# Altium PCB card.PcbDoc
Units mil, origin at the board's own origin, x right, y up, seen from the top; angles counter-clockwise.
Board outline 5110 x 4320 mil, 2 copper layers (Top Layer, Bottom Layer); 35 components, 32 nets, 133 pads, 60 vias.
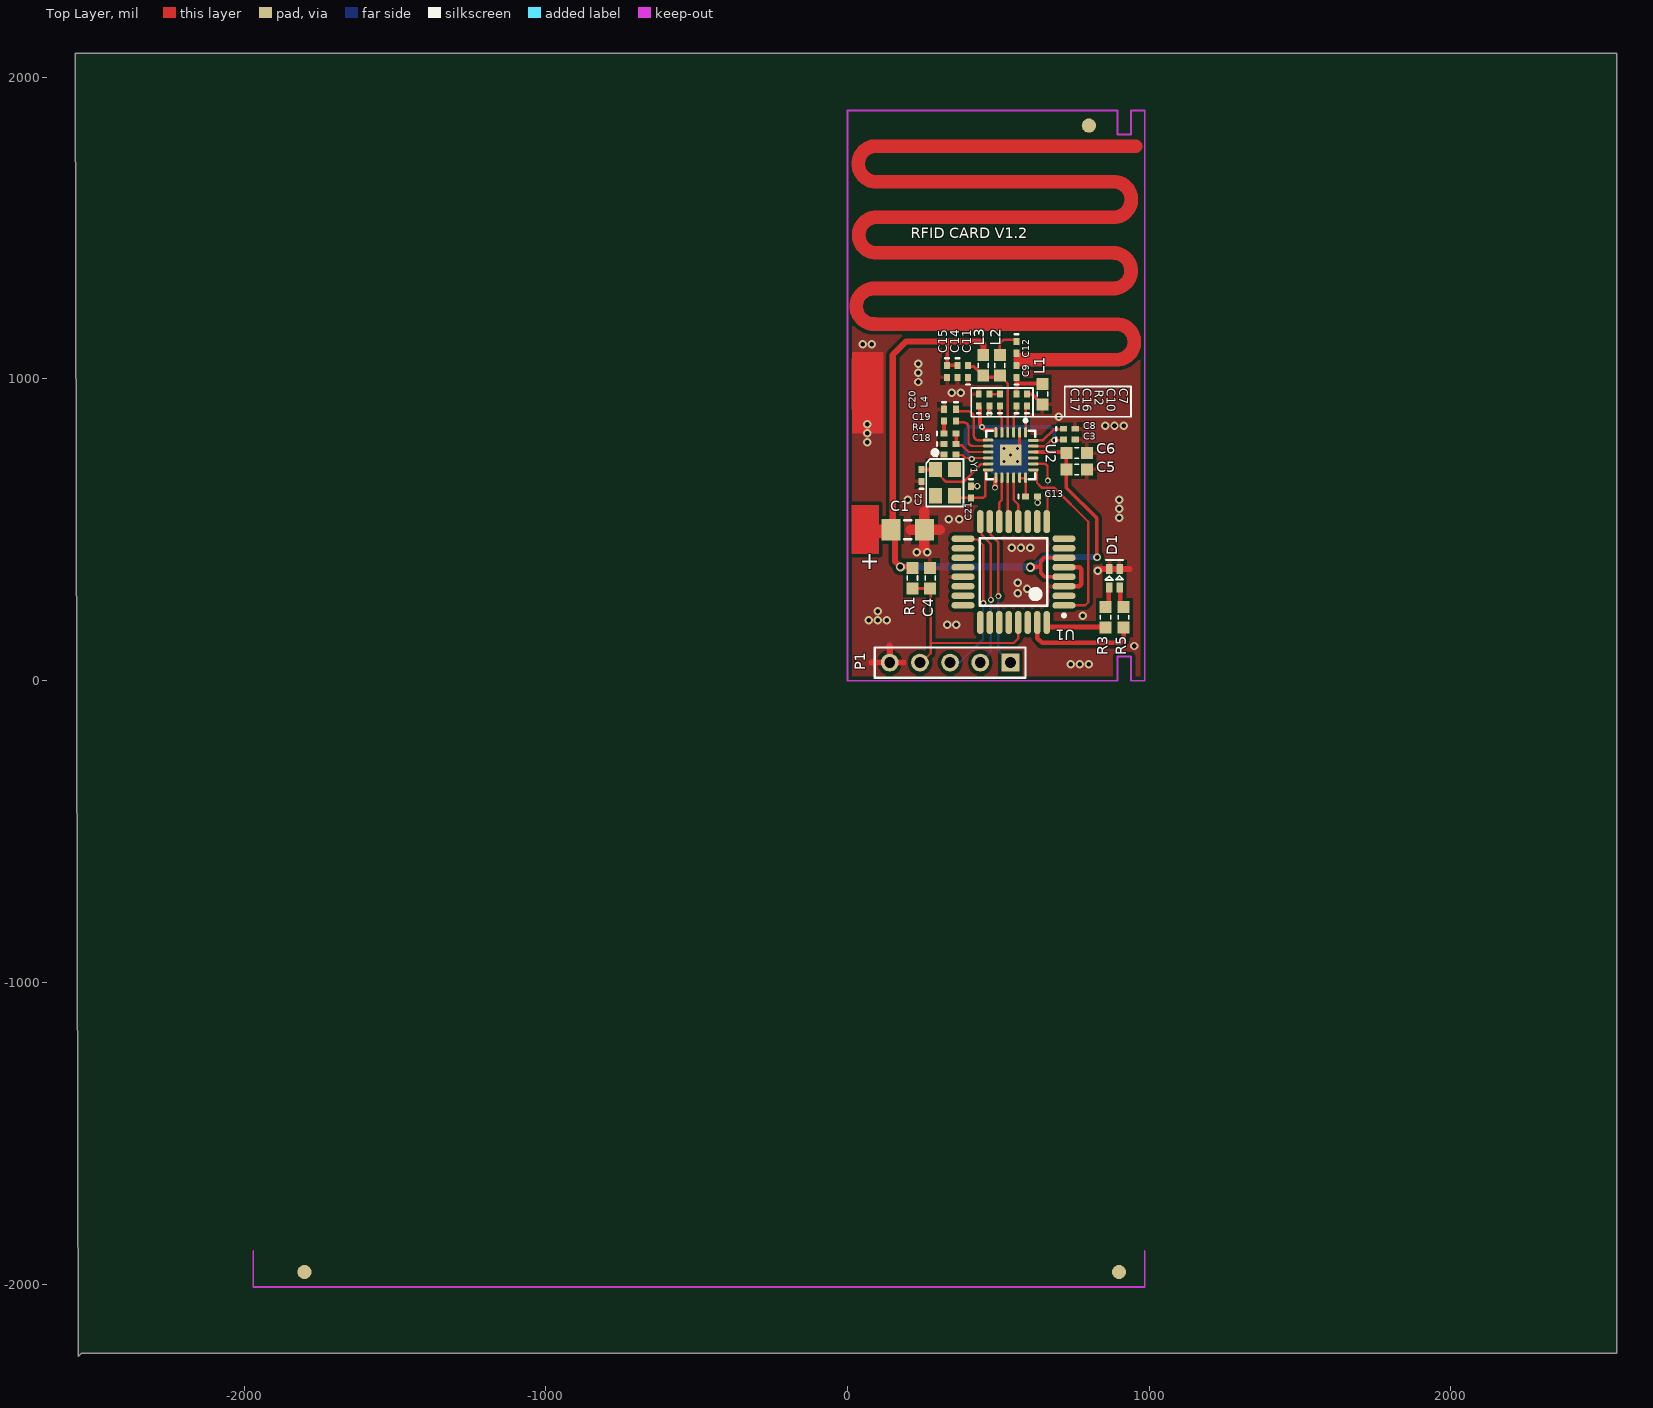
[diagram p0: Top Layer view]
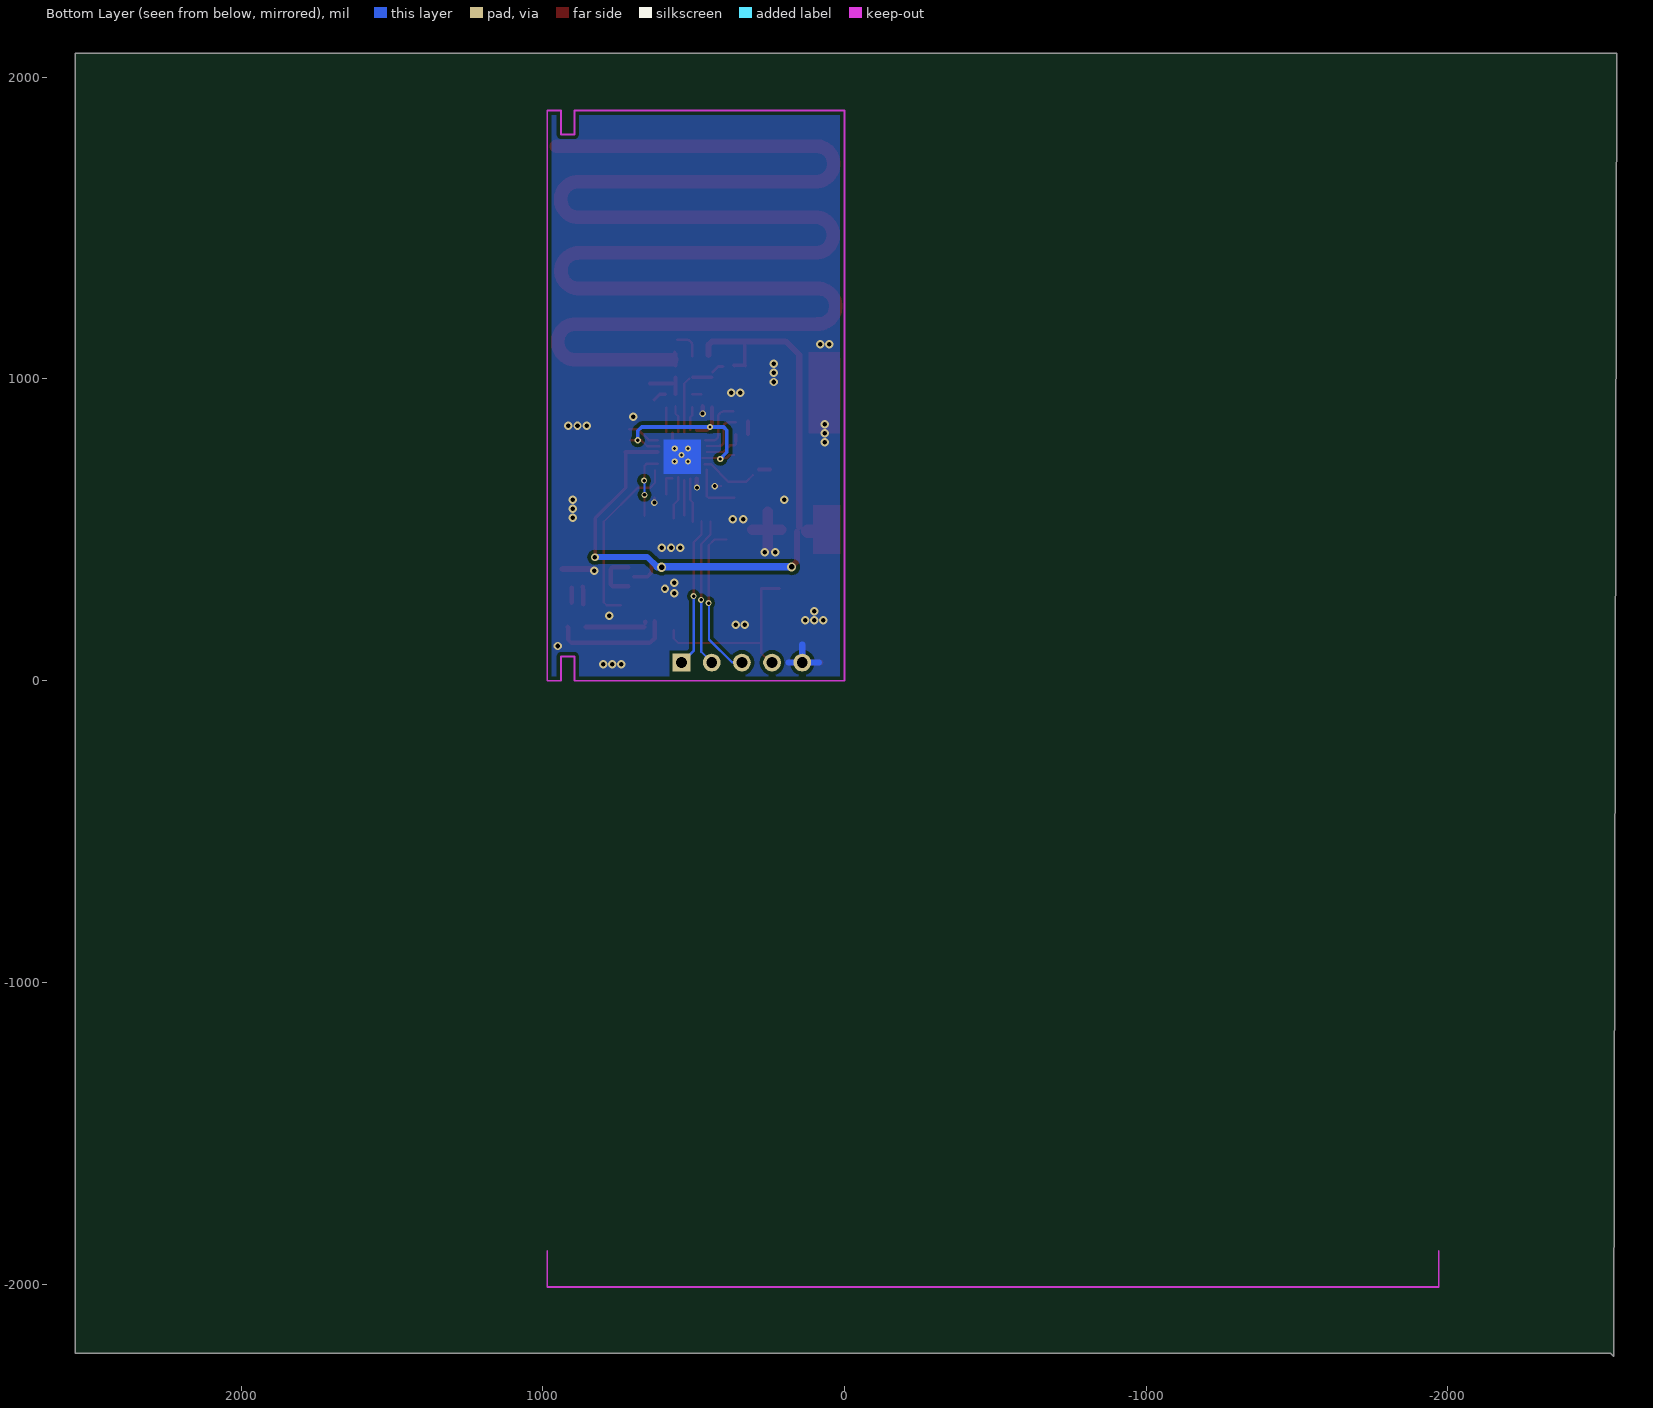
[diagram p1: Bottom Layer view, seen from below]

## Layer stack, top to bottom
Top Layer: signal copper 1.4
Dielectric: core 12.6, FR-4, Dk 4.8
Bottom Layer: signal copper 1.4

## Board outline
-2560,2080 2550,2080 2550,-2230 -2540,-2230 -2550,-2240

## Design rules (kind name [scope] priority, off if disabled: settings)
Clearance [All] p1 off: gap=8
ComponentClearance [All] p1 off: gap=10 collisioncheckmode=3 verticalgap=10
HoleSize [All] p1: absolutevalues=TRUE maxlimit=100 minlimit=0 maxpercent=80.000 minpercent=20.000
PolygonConnect [All] p1: connectstyle=Relief reliefconductorwidth=12 reliefentries=4 polygonreliefangle="90 Angle"
RoutingVias [All] p1: holewidth=15 width=25 viastyle="Through Hole" minholewidth=8 minwidth=15 maxholewidth=80 maxwidth=50
SolderMaskExpansion [All] p1: expansion=4
TestPointUsage [All] p1: valid=0 allowmultiple=FALSE
Testpoint [All] p1: side=15 testpointundercomponent=TRUE minsize=40 maxsize=100 preferedsize=60 minholesize=0 maxholesize=40 preferedholesize=32 testpointgrid=1 style=1023 order=0123456789
Width [All] p1: maxlimit=100 minlimit=8 preferedwidth=10 minimp=50.000000 maximp=50.000000 favimp=50.000000
17 further rules are at their usual default settings.

## Components (designator, comment, footprint, x,y, rotation, side; value= is the part's Value field where it differs from the comment)
C1 "Cap" 3216[1206] 200,500 r180 top
C2 "Cap" 0402-A 245,680 r90 top
C3 "Cap" 0402-A 735,800 r0 top
C4 "Cap" 0603 274,340 r90 top
C5 "Cap" 0603 760,700 r0 top
C6 "Cap" 0603 760,755 r0 top
C7 "Cap" 0402-A 595,930 r90 top
C8 "Cap" 0402-A 735,835 r0 top
C9 "Cap" 0402-A 560,1025 r90 top
C10 "Cap" 0402-A 560,930 r90 top
C11 "Cap" 0402-A 400,1025 r90 top
C12 "Cap" 0402-A 560,1105 r270 top
C13 "Cap" 0402-A 610,610 r0 top
C14 "Cap" 0402-A 365,1025 r270 top
C15 "Cap" 0402-A 330,1025 r270 top
C16 "Cap" 0402-A 470,930 r90 top
C17 "Cap" 0402-A 435,930 r90 top
C18 "Cap" 0402-A 340,750 r0 top
C19 "Cap" 0402-A 340,785 r0 top
C20 "Cap" 0402-A 320,880 r270 top
C21 "Cap" 0402-A 410,625 r270 top
D1 "LED" 0603-LED-DOUBLE 902,310 r90 top
L1 "Inductor" 0603 646,950 r270 top
L2 "Inductor" 0603 505,1045 r90 top
L3 "Inductor" 0603 450,1045 r90 top
L4 "Inductor" 0402-A 360,880 r270 top
P1 "ISP" HDR1X5 540,60 r180 top
R1 "Res1" 0603 215,340 r90 top
R2 "Res1" 0402-A 505,930 r90 top
R3 "Res1" 0603 855,210 r90 top
R4 "Res1" 0402-A 340,820 r0 top
R5 "Res1" 0603 915,210 r90 top
U1 "ATmega8-16AC" 32A_M 550,360 r180 top
U2 "A7139" QFN24N 541,748 r270 top
Y1 "12.8M CL=20pF" XT3225 355,700 r270 top

## Footprints (in the part's own frame and the unit in brackets; to place one, negate y for a bottom-side part, rotate by r counter-clockwise, add the part's x,y. Pads: shape width x height; smd on the part's side, far side on the other; paste and mask are expansions set on the pad)
32A_M [mm] "32-Pin Thin Quad Flat Pack 0.8 mm Pitch, IPC Low Density"
  oval 1.95x0.559 smd: 1(-4.25,2.8) 2(-4.25,2) 3(-4.25,1.2) 4(-4.25,0.4) 5(-4.25,-0.4) 6(-4.25,-1.2) 7(-4.25,-2) 8(-4.25,-2.8) 17(4.25,-2.8) 18(4.25,-2) 19(4.25,-1.2) 20(4.25,-0.4) 21(4.25,0.4) 22(4.25,1.2) 23(4.25,2) 24(4.25,2.8)
  oval 0.559x1.95 smd: 9(-2.8,-4.25) 10(-2,-4.25) 11(-1.2,-4.25) 12(-0.4,-4.25) 13(0.4,-4.25) 14(1.2,-4.25) 15(2,-4.25) 16(2.8,-4.25) 25(2.8,4.25) 26(2,4.25) 27(1.2,4.25) 28(0.4,4.25) 29(-0.4,4.25) 30(-1.2,4.25) 31(-2,4.25) 32(-2.8,4.25)
  silkscreen extent -4.38,-2.85 2.85,3.77, body extent -3.5,-3.5 3.5,3.5, height 1.2
0402-A [mm] "Chip Inductor; Body 1 x 0.5 mm (LxW typ)"
  rect 0.6x0.5 smd: 1(-0.5,0) 2(0.5,0)
  silkscreen extent -1.1,-0.15 -1.1,0.15
0603 [mm]
  rect 1x1 smd: 1(-0.864,0) 2(0.864,0)
  silkscreen extent -0.18,-0.43 0.18,0.43
0603-LED-DOUBLE [mil]
  rect 33x22 smd: 1(-1,34) 2(-1,0) 3(60,34) 4(60,0)
  silkscreen extent 24,-12 90,47
3216[1206] [mm] "Chip Resistor; Body 3.2 x 1.6 mm (LxW typ)"
  rect 1.6x1.8 smd: 1(-1.4,0) 2(1.4,0)
  silkscreen extent -0.3,-0.8 0.3,0.8
HDR1X5 [mm] "Connector; Header; 5 Position"
  rect 1.5x1.5 hole 0.9: 1(0,0)
  round 1.5 hole 0.9: 2(2.54,0) 3(5.08,0) 4(7.62,0) 5(10.16,0)
  silkscreen extent -1.27,-1.27 11.43,1.27
QFN24N [mm] "QFN, 24-Leads, Body 4.1x4.1mm (max), Pitch 0.50mm, IPC Medium Density"
  oval 0.889x0.25 smd: 1(-1.905,1.25) 2(-1.905,0.75) 3(-1.905,0.25) 4(-1.905,-0.25) 5(-1.905,-0.75) 6(-1.905,-1.25) 13(1.905,-1.25) 14(1.905,-0.75) 15(1.905,-0.25) 16(1.905,0.25) 17(1.905,0.75) 18(1.905,1.25)
  oval 0.25x0.889 smd: 7(-1.25,-1.905) 8(-0.75,-1.905) 9(-0.25,-1.905) 10(0.25,-1.905) 11(0.75,-1.905) 12(1.25,-1.905) 19(1.25,1.905) 20(0.75,1.905) 21(0.25,1.905) 22(-0.25,1.905) 23(-0.75,1.905) 24(-1.219,1.905)
  rect 1.8x1.8 smd: 25(0,0)
  silkscreen extent -3.02,-2.05 2.05,2.05, body extent -2.05,-2.05 2.05,2.05, height 0.8
XT3225 [mm]
  rect 1.3x1.1 smd: 1(0,-1.6) 2(2.2,-1.6) 3(2.2,0) 4(0,0)
  silkscreen extent -1.6,-2.39 3.1,0.76

## Part data
C1 C2 C3 C4 C5 C6 C7 C8 C9 C10 C11 C12 C13 C14 C15 C16 C17 C18 C19 C20 C21: "Capacitor"
D1: library part LED-DOUBLE
P1: library part "Header 5", "Header, 5-Pin"
R1 R2 R3 R4 R5: "Resistor"
U1: "8-Bit AVR Microcontroller with 8K Bytes of In-System Programmable Flash Memory"
Y1: library part XTAL, "Crystal Oscillator"

## Free pads (board coordinates)
  round 47.24 smd: 3(800,1840) 6(900,-1960) 7(-1800,-1960)

## Via types
v1: diameter 28, hole 15, Top Layer to Bottom Layer, 40 vias
v2: diameter 20, hole 12, Top Layer to Bottom Layer, 6 vias
v3: diameter 20, hole 10, Top Layer to Bottom Layer, tented top, 5 vias
v4: diameter 22, hole 13, Top Layer to Bottom Layer, 3 vias
v5: diameter 21, hole 11, Top Layer to Bottom Layer, 3 vias
v6: diameter 30, hole 18, Top Layer to Bottom Layer, 2 vias
v7: diameter 25, hole 15, Top Layer to Bottom Layer, 1 vias

## Nets (pads, with @x,y where several pads share a name; then routed paths per layer and width w, separated by ;. In a path a pad name is that pad's centre, name@x,y a point inside that pad or via, vN(x,y) a via of type N, cw(c..) or ccw(c..) an arc to the next point about the centre after c; other vN are vias at no path point)
GIO1: U1.1 U2.19 | length 592.6
  Top Layer w8: U2.19@628,697 628,656 645,639 686,639 798,527 798,260 788,250 U1.1@741,250
GIO2: U1.9 U2.20 | length 213.9
  Top Layer w8: U2.20@618.56,718.47 656.53,718.47 663,712 v2@663,662 ; U1.9@663,547.24 v2(663,616)
  Bottom Layer w8: v2@663,619 v2@663,667
  other v2: 664,663
GND: C1.1 C2.1 C3.2 C4.2 C5.2 C6.2 C7.2 C8.2 C11.1 C13.2 C14.2 C15.2 C16.1 C17.2 C18.1 C19.1 C20.1 C21.1 D1.3 D1.4 L1.2 P1.5 U1.3 U1.5 U1.21 U2.2 U2.13 U2.25 | length 962.4
  Top Layer w10: v4@420,645 v4@429,645 ; U2.25@570.53,777.53 U2.2@570.53,821 ; v4@630,590.86 C13.2@630,605
  Top Layer w12: C7.2 612.31,949.69 L1.2@631,931
  Top Layer w15: v4@470,884 C16.1 ; v2@490,640 U2.13@490,670 ; U1.3 767.76,312.76 775,320 775,370 769.25,375.75 U1.5
  Top Layer w20: 80,60 185,60 ; P1.5 140,115 ; v1@840,370 935,370
  Top Layer w35: 210,500 305,500 ; 255,440 255,560
  Bottom Layer w20: 85,60 185,60 ; P1.5@140,65 140,120
  other v1: 740,55 770,55 800,55 950,115 330,185 360,185 70,200 100,200 130,200 780,215 100,230 565,290 595,305 565,325 830,365 230,425 265,425 545,440 575,440 605,440 335,535 370,535 900,540 900,570 200,600 900,600 65,790 65,820 855,845 885,845 915,845 65,850 700,875 345,955 375,955 235,990 235,1020 235,1050 50,1115 80,1115
  other v2: 489,640
  other v3: 519.35,726.35 562.65,726.35 541,748 519.35,769.65 562.65,769.65
  other v4: 630,590 430,645 470,885
MISO: P1.2 U1.16 | length 497.3
  Top Layer w8: U1.16@444,527 444,484 475,453 v2@475,270
  Bottom Layer w8: P1.2@440,55 440,61 475,96 v2(475,268)
MOSI: P1.1 U1.15 | length 496.1
  Top Layer w8: U1.15@474,528 474,484 500,458 v2(500,280)
  Bottom Layer w8: v2(500,280) 500,99 537,62 P1.1@537,58
MSCK: P1.3 U1.17 | length 512.4
  Top Layer w8: U1.17@392,468 431,468 450,449 v2(450,257)
  Bottom Layer w8: P1.3@346,61 373,61 449,137 v2@449,257
NetC2_2: C2.2 U2.11 Y1.1 | length 231.2
  Top Layer w8: Y1.1@304,681 326,659 384,659 443,718 U2.11@464,718
  Top Layer w12: C2.2@247,700 Y1.1@284.69,700
NetC7_1: C7.1 U2.1 | length 80
  Top Layer w8: U2.1@590.21,825.56 C7.1@590.21,905.53
NetC8_1: C8.1 U2.24 | length 110.3
  Top Layer w8: U2.24@618.56,797.21 648.21,797.21 684,833 C8.1@714,833
NetC9_1: C9.1 C10.2 L1.1 | length 140.3
  Top Layer w12: C10.2 C9.1@560,1006 ; 562,985 L1.1@646,985
NetC9_2: C9.2 C12.2 | length 6298.9
  Top Layer w8: C12.2@559,1082 560,1082.21 C12.2@560.62,1082.34
  Top Layer w13: C9.2@560.62,1045.02 C12.2@560.62,1082.34 ; C12.2@562.27,1085.01 C12.2@562.67,1087.98
  Top Layer w45.28: 94,1653.95 879.48,1653.95 cw(c881.96,1594.95) 878.99,1535.97 99,1535.97 ccw(c96.03,1476.99) 98.51,1417.98 878.49,1417.98 cw(c880.97,1358.98) 878,1300 ; 94,1771.93 955,1771.93 ; 97,1654 cw(c94.52,1713) 97.49,1771.98 ; 572,1064 889,1064 ccw(c891.97,1122.98) 889.49,1181.98 90.51,1181.98 cw(c88.03,1241.02) 91,1300 879.59,1300
NetC10_1: C10.1 U2.3 | length 88.5
  Top Layer w8: U2.3@550.84,825.56 550.84,875.84 560,885 C10.1
NetC11_2: C11.2 L2.1 L3.1 U2.4 | length 284.8
  Top Layer w8: L2.1@515,1001 531,985 U2.4@531,829 ; U2.4@531,823 531.01,825.56 U2.4@531,824
  Top Layer w10: C11.2@403,1041 419,1041 L3.1@436.69,1023.31
  Top Layer w12: L3.1@441,1006 L2.1@502,1006
NetC12_1: C12.1 L2.2 | length 93.4
  Top Layer w8: L2.2@505,1076 505,1111.93 cw(c522.07,1111.93) 510,1124 ; 511,1125 cw(c522.49,1113.51) 522.49,1129.76 C12.1@553.76,1129.76
NetC13_1: C13.1 U2.17 U2.18 | length 73
  Top Layer w8: U2.17@570.53,670.44 590.21,670.44 C13.1@590.21,617.1
NetC16_2: C16.2 R2.2 | length 28.7
  Top Layer w8: C16.2@475.31,949.69 R2.2@504,949.69
NetC19_2: C19.2 R4.2 U2.9 | length 129.5
  Top Layer w8: C19.2@360,785 365,780 380,780 402,758 U2.9@456,758
  Top Layer w12: C19.2@360,792.69 R4.2@360,815
NetC20_2: C20.2 R4.1 | length 43
  Top Layer w12: R4.1@320,817 C20.2@320,860
NetC21_2: C21.2 U2.12 Y1.3 | length 180.3
  Top Layer w8: Y1.3@365,606 450,606 456,612 U2.12@456,698.79
NetD1_1: D1.1 R3.2 | length 52
  Top Layer w15: R3.2@866.02,253.01 D1.1@866,303 ; D1.1@867,311 D1.1@867.08,308.96
NetD1_2: D1.2 R5.2 | length 50
  Top Layer w15: R5.2@904.02,258.01 D1.2@904,308
NetL4_1: L4.1 U2.7 | length 176.5
  Top Layer w8: L4.1@368,893 399,893 ; 398,893 cw(c398,872) 419,872 ; 419,873 419,812 ccw(c434,812) 434,797 U2.7@462,797
NetL4_2: L4.2 U2.8 | length 161.1
  Top Layer w8: L4.2@361,856 385,856 cw(c385,840) 401,840 401,792 ccw(c415,792) 415,778 ; 414,778 U2.8@456,778
NetR2_1: R2.1 U2.5 | length 78.5
  Top Layer w8: R2.1@505,907 505,880 511,874 U2.5@511,831
NetR3_1: R3.1 U1.32 | length 195.3
  Top Layer w15: U1.32@660.01,192.68 U1.32@660,195 ; U1.32@664,178 R3.1@857,178
NetR5_1: R5.1 U1.31 | length 396.6
  Top Layer w15: U1.31@629,197 628.98,192.68 628.99,141 645,125 905.08,125.08 915,135 R5.1 R5.1@917,178
RST: C4.1 P1.4 R1.1 U1.29 | length 647.1
  Top Layer w8: P1.4@240,55 276,91 C4.1@276,306 ; 278,125 551,125 566,140 U1.29@566,168
  Top Layer w10: R1.1 C4.1
SCK: U1.13 U2.15 | length 115
  Top Layer w8: U1.13@531,549 U2.15@531,664
SCS: U1.14 U2.14 | length 145.1
  Top Layer w8: U1.14 502.76,590.76 511,599 U2.14@511,669
SDIO: U1.12 U2.16 | length 141.8
  Top Layer w8: U2.16@551,670.44 U2.16@551,671 ; U2.16@551,674 551,599 566,584 U1.12@566,539
VCC: C1.2 C5.1 C6.1 C14.1 C15.1 L3.2 R1.2 U1.4 U1.6 U2.22 | length 2609.6
  Top Layer w12: C15.1@329,1044 330,1045 330,1125 ; C15.1@329,1045 C14.1@367,1045 ; U2.22@618.56,757.84 C6.1@726,757.84 ; U1.4@698,344 654,344 641,357 641,397 652,408 U1.6@699,408 ; C6.1@725,755 725,640 826,539 v7@826,410
  Top Layer w15: v6@607,377 638,377
  Top Layer w16: v6@175,378 R1.2@211,378
  Top Layer w20: C1.2@150,510 150,1080 195,1125 439,1125 450,1114 L3.2 ; C1.2@158,494 158,395 v6@175,378
  Top Layer w45: 73,496 C1.2@121,496
  Bottom Layer w20: 621,377 654,410 v7@827,410
  Bottom Layer w25: v6@176,377 621,377
  other v6: 606,376 175,377
  other v7: 827,409
VDA: C3.1 C17.1 C18.2 U2.6 U2.10 U2.23 | length 768.8
  Top Layer w8: C18.2@366,748 381,748 391,738 U2.10@471,738 ; U2.23@614,777 654,777 674,797 C3.1@710,797
  Top Layer w12: C17.1@439,906.32 439,848 456,831 U2.6@489,831
  Bottom Layer w12: v5(412,735) 390,757 390,830 401,841 672,841 685,828 v5(685,797)
  other v5: 446,841
pads on no net: U1.2 U1.7 U1.8 U1.10 U1.11 U1.18 U1.19 U1.20 U1.22 U1.23 U1.24 U1.25 U1.26 U1.27 U1.28 U1.30 U2.21 Y1.2 Y1.4

## Polygon pours and split planes (outlines as drawn)
GND on Top Layer "Bottom Layer-No Net" (solid, remove dead copper): -85,1985 -75,1975 1135,1975 1135,-155 1150,-170 1145,-175 -125,-175
GND on Bottom Layer "Bottom Layer-No Net" (solid, remove dead copper): -490,2100 1255,2100 1345,2010 1200,1865 1200,-25 -150,-25 -210,-85

## Keep-outs
Keep-Out Layer:
  lines w6: -1970,-1890.24 -1970,-2010 985,-2010 985,-1890 ; 895,1810 940,1810 940,1890 985,1890 985,0 ; 895,1810.47 895,1889.76 0,1889.76 ; 0,-0.24 895,-0.24 0,-0.24 ; 0,-0.24 0,1889.76 ; 0,-0.24 0,1889.76 ; 0,1889.76 0,0 895,0 895,80 940,80 940,0 ; 940,0 985,0 ; 940,0 985,0 ; 940,0 985,0

## Other copper
Top Layer:
  rectangle net GND: 15,820 120,1090
  rectangle net GND: 13,898 105,1070
  rectangle net VCC: 13,420 105,582
  pour cut-out: 485,800 595,800 595,690 485,690
Bottom Layer:
  rectangle net GND: 475,685 600,800

## Silkscreen, mask and mechanical layers (free items; w line width, h text height)
Top Overlay:
  lines w6: 615,875 615,970 610,970 410,970 410,880 410,875 900,875 ; 720,875 720,975 940,975 940,875 720,875
  text "RFID CARD V1.2" at 210,1455 h60
  text "+" at 40,350 h100
Top Solder:
  rectangle: 10,895 110,1075
  rectangle: 10,415 110,585